# Altium PCB Lidar_Robot_Power.PcbDoc
Units mm, origin at the board's own origin, x right, y up, seen from the top; angles counter-clockwise.
Board outline 75.44 x 88.01 mm, 2 copper layers (Top Layer, Bottom Layer); 21 components, 18 nets, 82 pads, 0 vias.
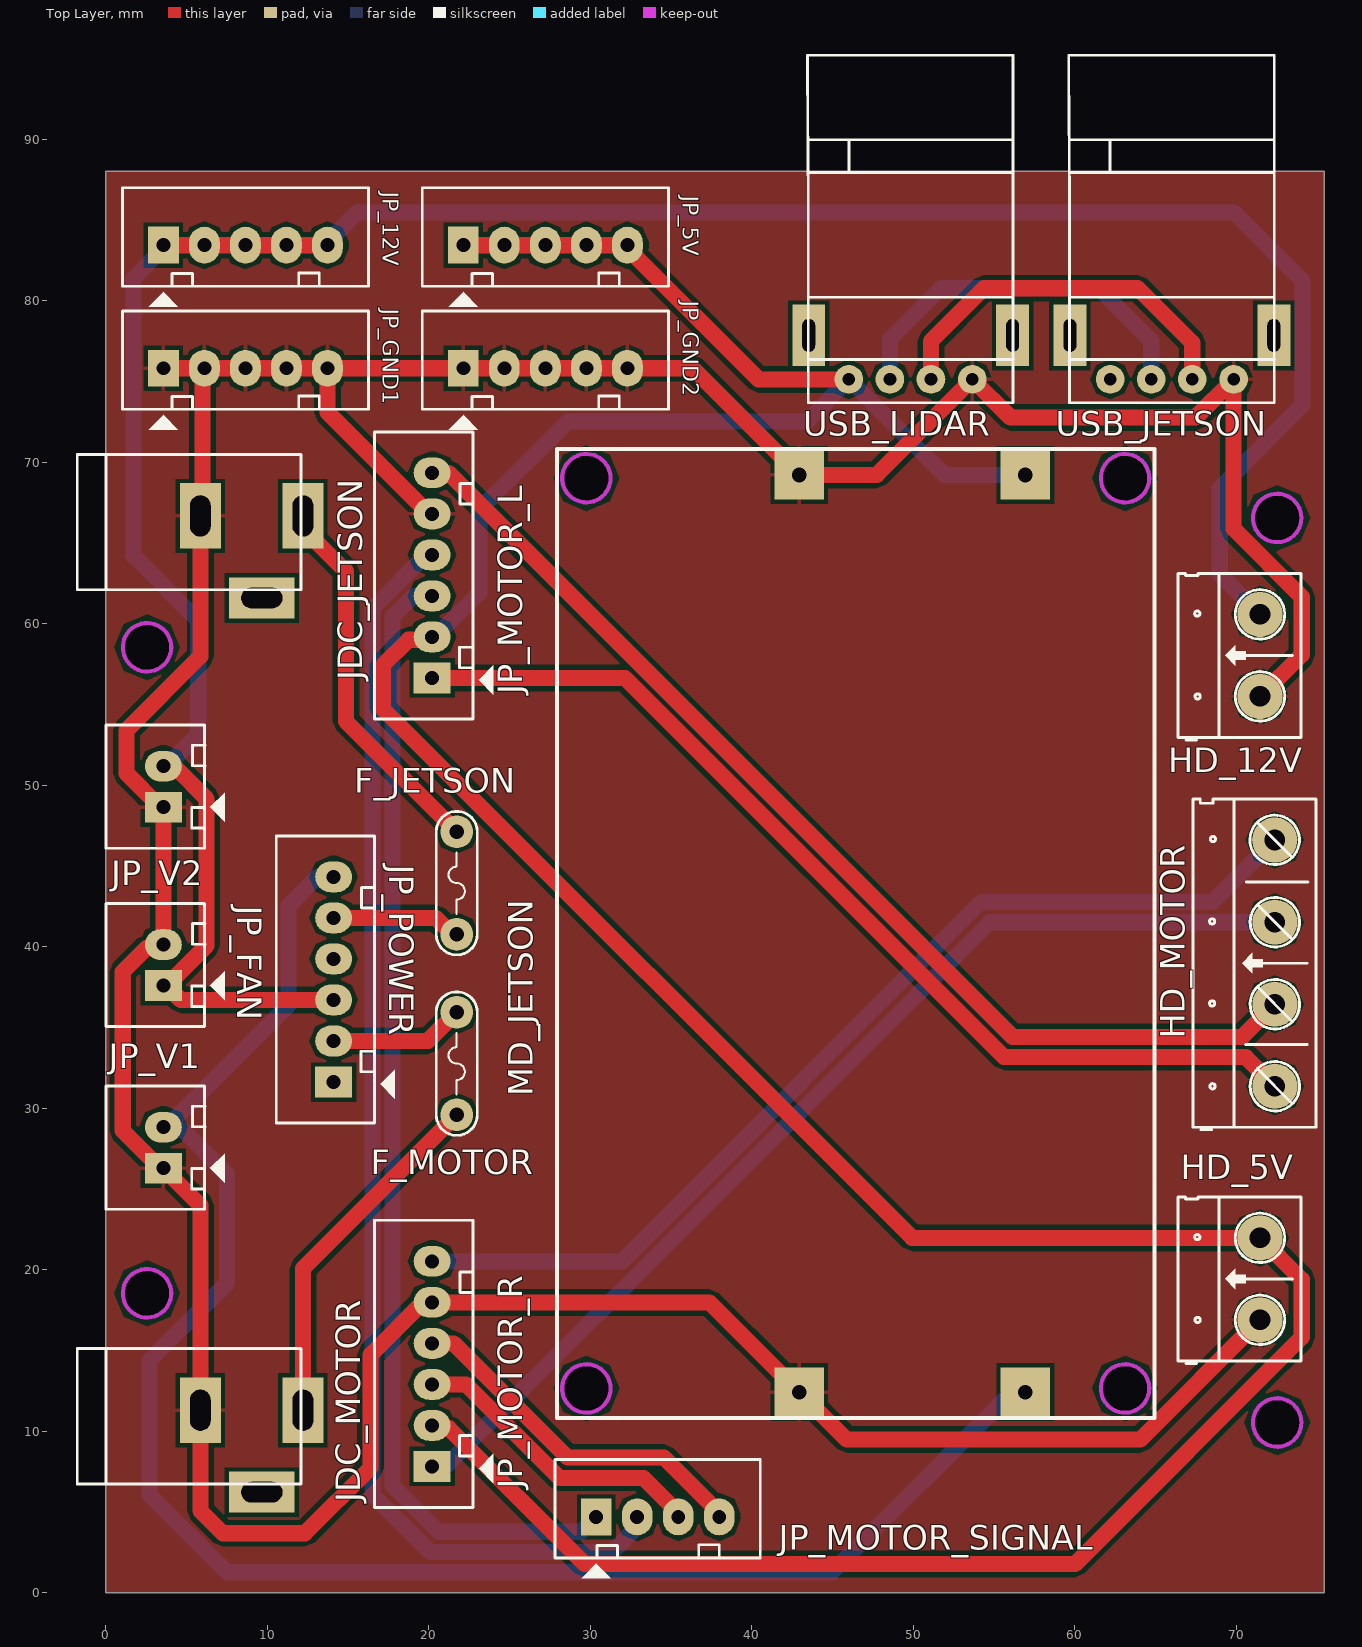
[diagram p0: Top Layer view]
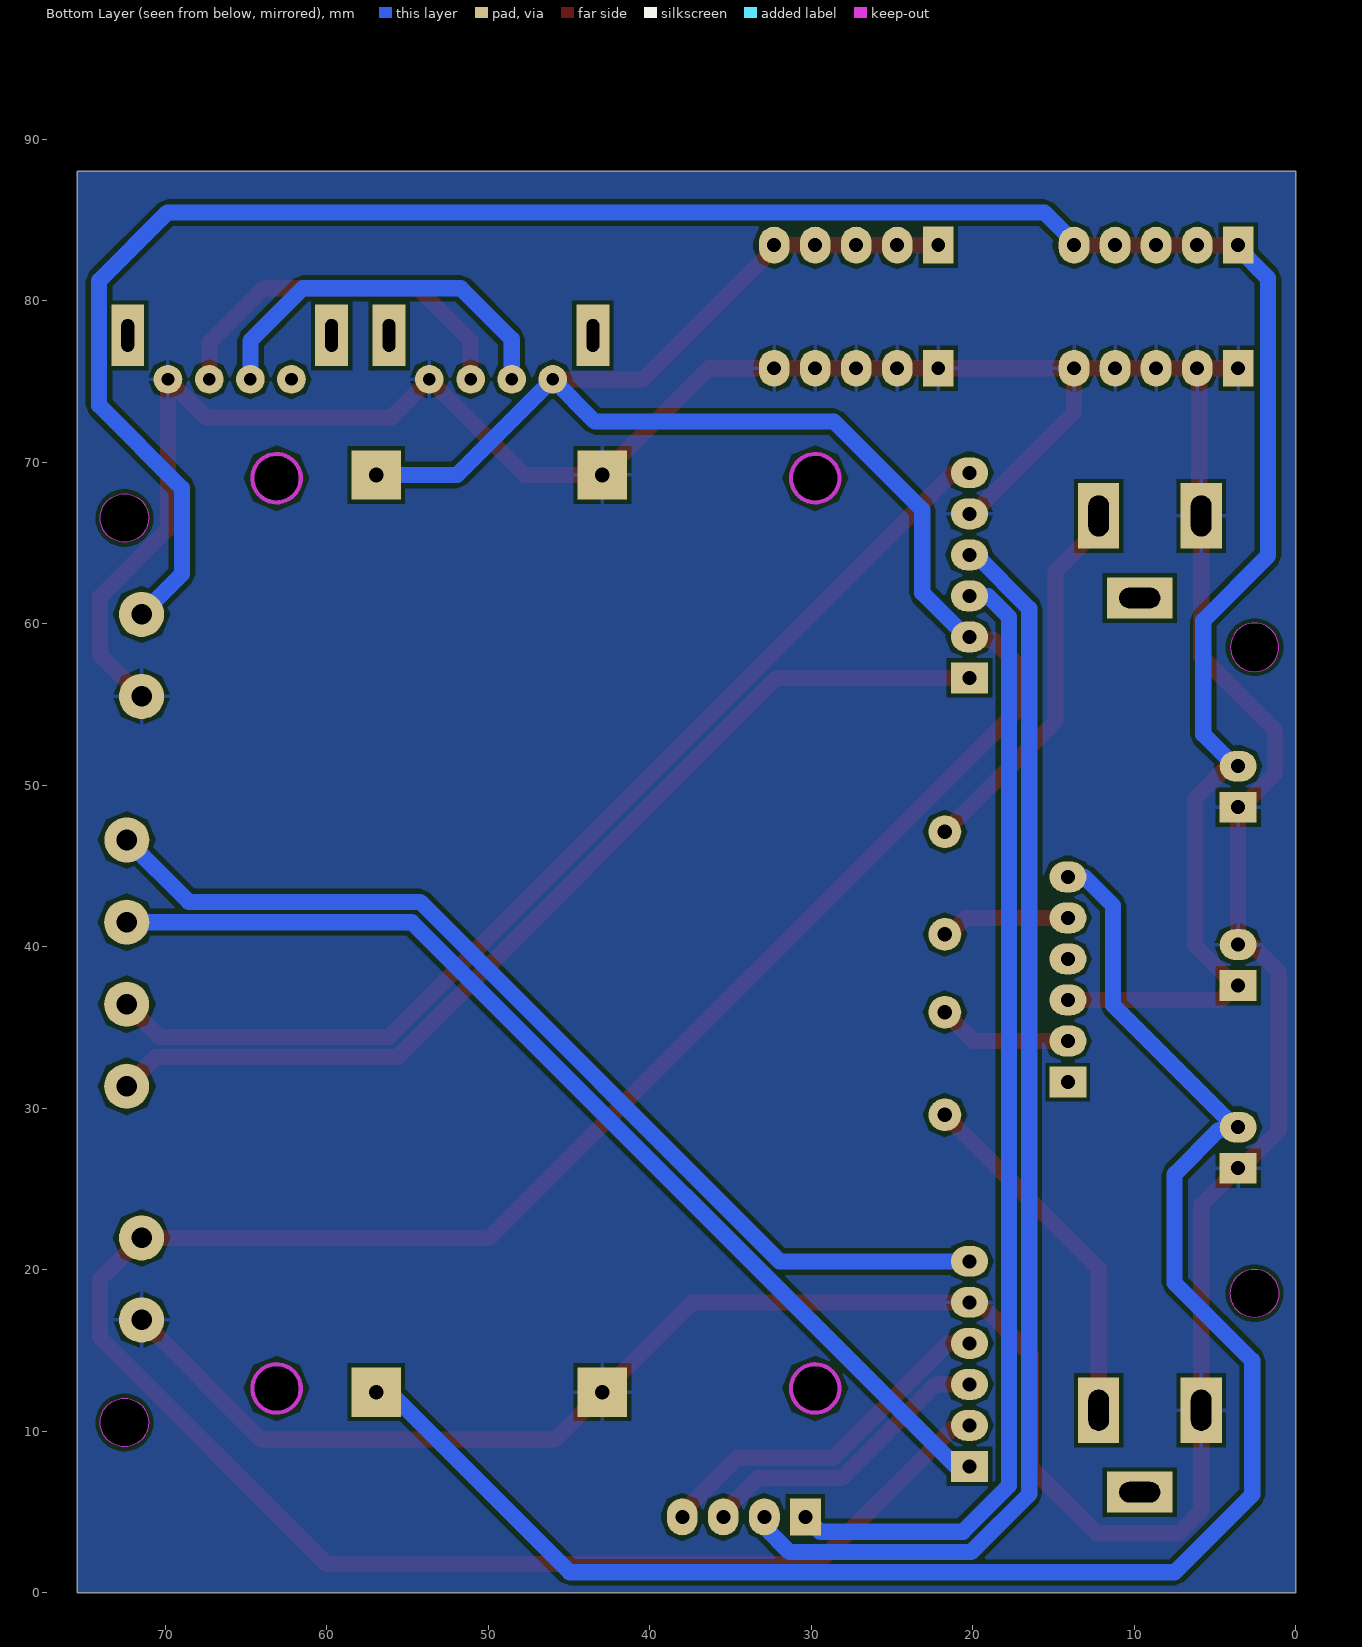
[diagram p1: Bottom Layer view, seen from below]

## Layer stack, top to bottom
Top Solder: solder mask 0.0102, Solder Resist, Dk 3.5
Top Layer: signal copper 0.0356
Dielectric 1: dielectric 0.32, FR-4, Dk 4.8
Bottom Layer: signal copper 0.0356
Bottom Solder: solder mask 0.0102, Solder Resist, Dk 3.5

## Board outline
0,0 75.438,0 75.438,88.011 0,88.011
cut-out: 28.247,12.649 ccw(c29.747,12.649) 29.747,11.149 ccw(c29.747,12.649) 31.247,12.649 ccw(c29.747,12.649) 29.747,14.149 ccw(c29.747,12.649)
cut-out: 61.597,12.649 ccw(c63.097,12.649) 63.097,11.149 ccw(c63.097,12.649) 64.597,12.649 ccw(c63.097,12.649) 63.097,14.149 ccw(c63.097,12.649)
cut-out: 61.597,69.012 ccw(c63.097,69.012) 63.097,67.512 ccw(c63.097,69.012) 64.597,69.012 ccw(c63.097,69.012) 63.097,70.512 ccw(c63.097,69.012)
cut-out: 29.747,67.512 cw(c29.747,69.012) 28.247,69.012 cw(c29.747,69.012) 29.747,70.512 cw(c29.747,69.012) 31.247,69.012 cw(c29.747,69.012)
cut-out: 71.017,10.541 ccw(c72.517,10.541) 72.517,9.041 ccw(c72.517,10.541) 74.017,10.541 ccw(c72.517,10.541) 72.517,12.041 ccw(c72.517,10.541)
cut-out: 71.017,66.548 ccw(c72.517,66.548) 72.517,65.048 ccw(c72.517,66.548) 74.017,66.548 ccw(c72.517,66.548) 72.517,68.048 ccw(c72.517,66.548)
cut-out: 1.04,58.541 cw(c2.54,58.541) 2.54,60.041 cw(c2.54,58.541) 4.04,58.541 cw(c2.54,58.541) 2.54,57.041 cw(c2.54,58.541)
cut-out: 1.04,18.541 ccw(c2.54,18.541) 2.54,17.041 ccw(c2.54,18.541) 4.04,18.541 ccw(c2.54,18.541) 2.54,20.041 ccw(c2.54,18.541)

## Design rules (kind name [scope] priority, off if disabled: settings)
Clearance [All] p1: gap=0.254 ignorepadtopadclearanceinfootprint=FALSE except(0: Arc-Hole Track-Hole SMDPad-Hole THPad-Hole Via-Hole Fill-Hole Poly-Hole Region-Hole Text-Hole)
PolygonConnect [All] p1: connectstyle=Relief reliefconductorwidth=0.254 reliefentries=4 polygonreliefangle="90 Angle" airgapwidth=0.254
RoutingVias [All] p1: holewidth=0.711 width=1.27 viastyle="Through Hole" minholewidth=0.711 minwidth=1.27 maxholewidth=0.711 maxwidth=1.27
SolderMaskExpansion [All] p1: expansion=0.102
Width [All] p1: maxlimit=1 minlimit=0.762 preferedwidth=0.762 minimp=50.000000 maximp=50.000000 favimp=50.000000
30 further rules are at their usual default settings.

## Components (designator, comment, footprint, x,y, rotation, side; value= is the part's Value field where it differs from the comment)
F_JETSON "F1A_5A" FUSE2 21.717,47.117 r270 top value=Fuse
F_MOTOR "F1A_5A" FUSE2 21.717,29.591 r90 top value=Fuse
HD_5V "Header 2" HED2 71.456,16.891 r90 top
HD_12V "Header 2" HED2 71.456,55.499 r90 top
HD_MOTOR "Header 4" HED4 72.379,31.359 r90 top
JDC_JETSON "Jac DC" DC-IN 9.017,64.135 r0 top
JDC_MOTOR "Jac DC" DC-IN 9.017,8.763 r0 top
JP_5V "JP5" CON5 22.127,83.439 r0 top value="Connector 5"
JP_12V "JP5" CON5 3.556,83.439 r0 top value="Connector 5"
JP_FAN "JP2" CON2 3.556,37.592 r90 top value="Connector 2"
JP_GND1 "JP5" CON5 3.556,75.819 r0 top value="Connector 5"
JP_GND2 "JP5" CON5 22.127,75.819 r0 top value="Connector 5"
JP_MOTOR_L "JP6" CON6 20.193,56.642 r90 top value="Connector 6"
JP_MOTOR_R "JP6" CON6 20.193,7.82 r90 top value="Connector 6"
JP_MOTOR_SIGNAL "JP4" CON4 30.353,4.699 r0 top value="Connector 4"
JP_POWER "JP6" CON6 14.097,31.623 r90 top value="Connector 6"
JP_V1 "JP2" CON2 3.556,26.289 r90 top value="Connector 2"
JP_V2 "JP2" CON2 3.556,48.641 r90 top value="Connector 2"
MD_JETSON "Adjust Voltage (8A)" XL4016 64.926,10.82 r90 top
USB_JETSON "USB-S" USB-A 62.179,75.133 r0 top value=USB
USB_LIDAR "USB-S" USB-A 45.999,75.133 r0 top value=USB

## Footprints (in the part's own frame and the unit in brackets; to place one, negate y for a bottom-side part, rotate by r counter-clockwise, add the part's x,y. Pads: shape width x height; smd on the part's side, far side on the other; paste and mask are expansions set on the pad)
CON2 [mil] "CON2"
  rect 75x90 hole 34: 1(0,0)
  oval 75x90 hole 34: 2(100,0)
  silkscreen extent -100,-150 200,140, body extent -68,-70 168,107, height 236
CON4 [mil] "CON4"
  rect 75x90 hole 34: 1(0,0)
  oval 75x90 hole 34: 2(100,0) 3(200,0) 4(300,0)
  silkscreen extent -100,-150 400,140, body extent -90,-90 398,136, height 276
CON5 [mil] "CON5"
  rect 75x90 hole 34: 1(0,0)
  oval 75x90 hole 34: 2(100,0) 3(200,0) 4(300,0) 5(400,0)
  silkscreen extent -100,-150 500,140
CON6 [mil] "CON6"
  rect 75x90 hole 34: 1(0,0)
  oval 75x90 hole 34: 2(100,0) 3(200,0) 4(300,0) 5(400,0) 6(500,0)
  silkscreen extent -100,-150 600,140
DC-IN [mil] "Jac DC input"
  rect 100x160 hole 50 slot 100 at 90 deg: 1(125,100) 2(-125,100)
  rect 160x100 hole 50 slot 100 at 0 deg: 3(25,-100)
  silkscreen extent -425,-80 120,250, body extent -410,-105 134,269, height 434
FUSE2 [mil] "Fuse"
  round 80 hole 35: 1(0,0) 2(250,0)
  silkscreen extent -50,-50 300,50
HED2 [mil] "Header 2, 2 pin, hight 300mil, Pin to Pin 200, Colour Green"
  round 110 hole 50: 1(0,0) 2(200,0)
  silkscreen extent -106,-100 300,200, body extent -92,-140 302,155, height 394
HED4 [mil] "Header 4, 4 pin, hight 300mil, Pin to Pin 200, Colour Green"
  round 110 hole 50: 1(0,0) 2(200,0) 3(400.06,0.06) 4(600.39,0.39)
  silkscreen extent -106,-100 700,200
USB-A [mil]
  round 70 hole 31: 1(0,0) 2(100,0) 3(200,0) 4(301,0)
  rect 80x150 hole 31 slot 80 at 90 deg: 5(-98,107) 6(399,107)
  silkscreen extent -101,-57 401,790, body extent -97,0 399,784, height 177
XL4016 [mil] "Adjust Voltage (8A)"
  rect 120x120 hole 35.98: 0(63,866.14) 1(63,314.96) 2(2299,866.14) 3(2299,314.96)
  Keep-Out Layer circle w10: c2291,72 r59.06
  Keep-Out Layer circle w10: c2291,1385 r59.06
  Keep-Out Layer circle w10: c72,1385 r59.06
  Keep-Out Layer circle w10: c72,72 r59.06
  silkscreen extent 0,0 2362,1457

## Part data
F_JETSON F_MOTOR: library part Fuse, "Fuse", Designed by=VanDungEvn
HD_5V HD_12V: library part Hed2, "Header 2 (Green)"
HD_MOTOR: library part Hed4, "Header 4 (Green)"
JDC_JETSON JDC_MOTOR: library part DCIN, "Jac DC input"
JP_5V JP_12V JP_GND1 JP_GND2: library part Con5, "Connector 5"
JP_FAN JP_V1 JP_V2: library part Con2, "Connector 2"
JP_MOTOR_L JP_MOTOR_R JP_POWER: library part Con6, "Connector 6"
JP_MOTOR_SIGNAL: library part Con4, "Connector 4"
MD_JETSON: library part XL4016
USB_JETSON USB_LIDAR: library part USB_S, "USB connector"

## Nets (pads, with @x,y where several pads share a name; then routed paths per layer and width w, separated by ;. In a path a pad name is that pad's centre, name@x,y a point inside that pad or via, vN(x,y) a via of type N, cw(c..) or ccw(c..) an arc to the next point about the centre after c; other vN are vias at no path point)
5V: HD_5V.2 JP_5V.1 JP_5V.2 JP_5V.3 JP_5V.4 JP_5V.5 JP_MOTOR_L.2 JP_MOTOR_R.2 MD_JETSON.3 USB_LIDAR.1 | length 221
  Top Layer w1: JP_MOTOR_R.2 20.366,10.187 21.231,10.187 29.64,1.778 60.004,1.778 74.041,15.815 74.041,19.386 HD_5V.2 49.911,21.971 17.145,54.737 17.145,57.419 18.735,59.009 20.02,59.009 JP_MOTOR_L.2 ; JP_5V.1 JP_5V.2 JP_5V.3 JP_5V.4 JP_5V.5 32.287,83.248 40.402,75.133 USB_LIDAR.1
  Bottom Layer w1: JP_MOTOR_L.2 20.383,59.182 23.114,61.912 23.114,67.056 28.575,72.517 43.383,72.517 USB_LIDAR.1 51.918,69.215 MD_JETSON.3
12V: HD_12V.2 JP_12V.1 JP_12V.2 JP_12V.3 JP_12V.4 JP_12V.5 JP_FAN.1 JP_POWER.3 JP_V2.2 | length 159.7
  Top Layer w1: JP_FAN.1 JP_FAN.1@3.746,37.592 ; JP_V2.2 3.729,51.008 4.372,51.008 6.223,49.157 6.223,40.069 JP_FAN.1@3.746,37.592 ; JP_12V.1 JP_12V.2 JP_12V.3 JP_12V.4 JP_12V.5 ; JP_POWER.3 4.635,36.703 JP_FAN.1@3.746,37.592
  Bottom Layer w1: JP_V2.2 3.746,51.181 5.715,53.149 5.715,60.198 1.707,64.206 1.707,81.399 3.556,83.248 JP_12V.1 ; JP_12V.5 13.716,83.629 15.557,85.471 69.85,85.471 74.084,81.237 74.084,73.517 68.961,68.394 68.961,63.074 HD_12V.2
C1/A1: JP_MOTOR_R.4 JP_MOTOR_SIGNAL.4 | length 22.4
  Top Layer w1: JP_MOTOR_R.4 21.517,15.44 28.591,8.366 34.56,8.366 37.973,4.953 JP_MOTOR_SIGNAL.4
C1/A2: JP_MOTOR_L.4 JP_MOTOR_SIGNAL.2 | length 79.1
  Bottom Layer w1: JP_MOTOR_L.4 19.817,64.262 16.495,60.941 16.495,6.111 20.082,2.524 31.34,2.524 32.893,4.077 JP_MOTOR_SIGNAL.2
C2/B1: JP_MOTOR_R.3 JP_MOTOR_SIGNAL.3 | length 18.8
  Top Layer w1: JP_MOTOR_R.3 22.283,12.9 28.072,7.112 33.274,7.112 35.433,4.953 JP_MOTOR_SIGNAL.3
C2/B2: JP_MOTOR_L.3 JP_MOTOR_SIGNAL.1 | length 70.9
  Bottom Layer w1: JP_MOTOR_L.3 19.05,61.722 17.749,60.421 17.749,6.63 20.601,3.778 29.432,3.778 JP_MOTOR_SIGNAL.1
GND: HD_5V.1 HD_12V.1 JDC_JETSON.2 JDC_MOTOR.2 JP_FAN.2 JP_GND1.1 JP_GND1.2 JP_GND1.3 JP_GND1.4 JP_GND1.5 JP_GND2.1 JP_GND2.2 JP_GND2.3 JP_GND2.4 JP_GND2.5 JP_MOTOR_L.5 JP_MOTOR_R.5 JP_V1.1 JP_V2.1 MD_JETSON.0 MD_JETSON.2 USB_JETSON.4 USB_LIDAR.4 | length 268
  Top Layer w1: JP_GND1.1 JP_GND1.2 ; JP_MOTOR_L.5 20.002,66.802 13.716,73.088 JP_GND1.5 ; HD_5V.1 64.046,9.48 45.866,9.48 MD_JETSON.0 37.366,17.98 JP_MOTOR_R.5 19.631,17.98 16.383,14.732 16.383,7.747 12.319,3.683 7.239,3.683 5.842,5.08 JDC_MOTOR.2 5.842,24.003 4.199,25.646 4.199,25.837 3.746,26.289 JP_V1.1 3.365,26.289 1.04,28.614 1.04,38.444 2.555,39.959 3.383,39.959 JP_FAN.2 JP_V2.1 3.365,48.641 1.27,50.736 1.27,53.406 5.842,57.978 JDC_JETSON.2 5.969,66.802 5.969,75.692 JP_GND1.2 ; HD_12V.1 74.041,58.084 74.041,61.657 69.825,65.873 USB_JETSON.4 67.462,72.771 56.007,72.771 USB_LIDAR.4 47.727,69.215 MD_JETSON.2 36.322,75.819 JP_GND2.5 JP_GND2.4 JP_GND2.3 JP_GND2.2 JP_GND2.1 JP_GND1.5 ; JP_GND1.2 JP_GND1.3 JP_GND1.4 JP_GND1.5
IN+: JP_POWER.6 JP_V1.2 MD_JETSON.1 | length 108.4
  Bottom Layer w1: JP_POWER.6 13.081,44.323 11.303,42.545 11.303,36.386 3.746,28.829 JP_V1.2 3.729,28.656 4.745,28.656 7.493,25.908 7.493,19.174 2.688,14.369 2.688,6.075 7.493,1.27 44.95,1.27 56.1,12.421 MD_JETSON.1
M1_1: HD_MOTOR.2 JP_MOTOR_L.6 | length 67.5
  Top Layer w1: JP_MOTOR_L.6@20.193,69.374 JP_MOTOR_L.6 21.209,69.342 21.209,69.337 56.129,34.417 70.357,34.417 HD_MOTOR.2
M1_2: HD_MOTOR.4 JP_MOTOR_R.6 | length 63
  Bottom Layer w1: JP_MOTOR_R.6 31.955,20.52 54.209,42.775 68.535,42.775 HD_MOTOR.4
M2_1: HD_MOTOR.1 JP_MOTOR_L.1 | length 62.7
  Top Layer w1: JP_MOTOR_L.1 32.131,56.642 55.61,33.163 70.575,33.163 HD_MOTOR.1
M2_2: HD_MOTOR.3 JP_MOTOR_R.1 | length 66.1
  Bottom Layer w1: JP_MOTOR_R.1 21.028,7.82 54.729,41.521 HD_MOTOR.3
NetF_JETSON_1: F_JETSON.1 JDC_JETSON.1 | length 23.5
  Top Layer w1: JDC_JETSON.1 12.192,65.913 14.859,63.246 14.859,53.975 F_JETSON.1
NetF_JETSON_2: F_JETSON.2 JP_POWER.5 | length 8
  Top Layer w1: JP_POWER.5 20.422,41.783 21.438,40.767 F_JETSON.2
NetF_MOTOR_1: F_MOTOR.1 JDC_MOTOR.1 | length 22.2
  Top Layer w1: JDC_MOTOR.1 12.192,20.066 F_MOTOR.1
NetF_MOTOR_2: F_MOTOR.2 JP_POWER.2 | length 8.4
  Top Layer w1: JP_POWER.2 19.937,34.163 21.715,35.941 F_MOTOR.2
NetUSB_JETSON_2: USB_JETSON.2 USB_LIDAR.2 | length 23.7
  Bottom Layer w1: USB_LIDAR.2 48.539,77.622 51.689,80.772 61.468,80.772 64.719,77.521 USB_JETSON.2
NetUSB_JETSON_3: USB_JETSON.3 USB_LIDAR.3 | length 23.6
  Top Layer w1: USB_LIDAR.3 51.079,77.495 54.356,80.772 63.881,80.772 67.259,77.394 USB_JETSON.3
pads on no net: JDC_JETSON.3 JDC_MOTOR.3 JP_POWER.1 JP_POWER.4 USB_JETSON.1 USB_JETSON.5 USB_JETSON.6 USB_LIDAR.5 USB_LIDAR.6

## Polygon pours and split planes (outlines as drawn)
GND on Bottom Layer "Bottom Layer-GND" (solid, pour order 2): 0,88.011 75.438,88.011 75.438,0 0,0
GND on Top Layer "Top Layer-GND" (solid, pour order 4): 0,88.011 75.438,88.011 75.438,0 0,0

## Keep-outs
Top Layer:
  circle w0.254: c29.747,69.012 r1.5
  circle w0.254: c29.747,12.649 r1.5
  circle w0.254: c63.097,12.649 r1.5
  circle w0.254: c63.097,69.012 r1.5
  circle w0.254: c2.54,58.541 r1.5
  circle w0.254: c2.54,18.541 r1.5
  circle w0.254: c72.517,10.541 r1.5
  circle w0.254: c72.517,66.548 r1.5

## Other copper
Bottom Layer:
  region: 5.842,58.293